# Altium PCB LeBot.PcbDoc
Units mm, origin at the board's own origin, x right, y up, seen from the top; angles counter-clockwise.
Board outline 152.4 x 101.6 mm, 4 copper layers (Top Layer, Ground/Power, Power/Ground, Bottom Layer), stack 0.778 mm thick; 99 components, 76 nets, 338 pads, 96 vias.
Unrouted connection lines stored in the file: 163.
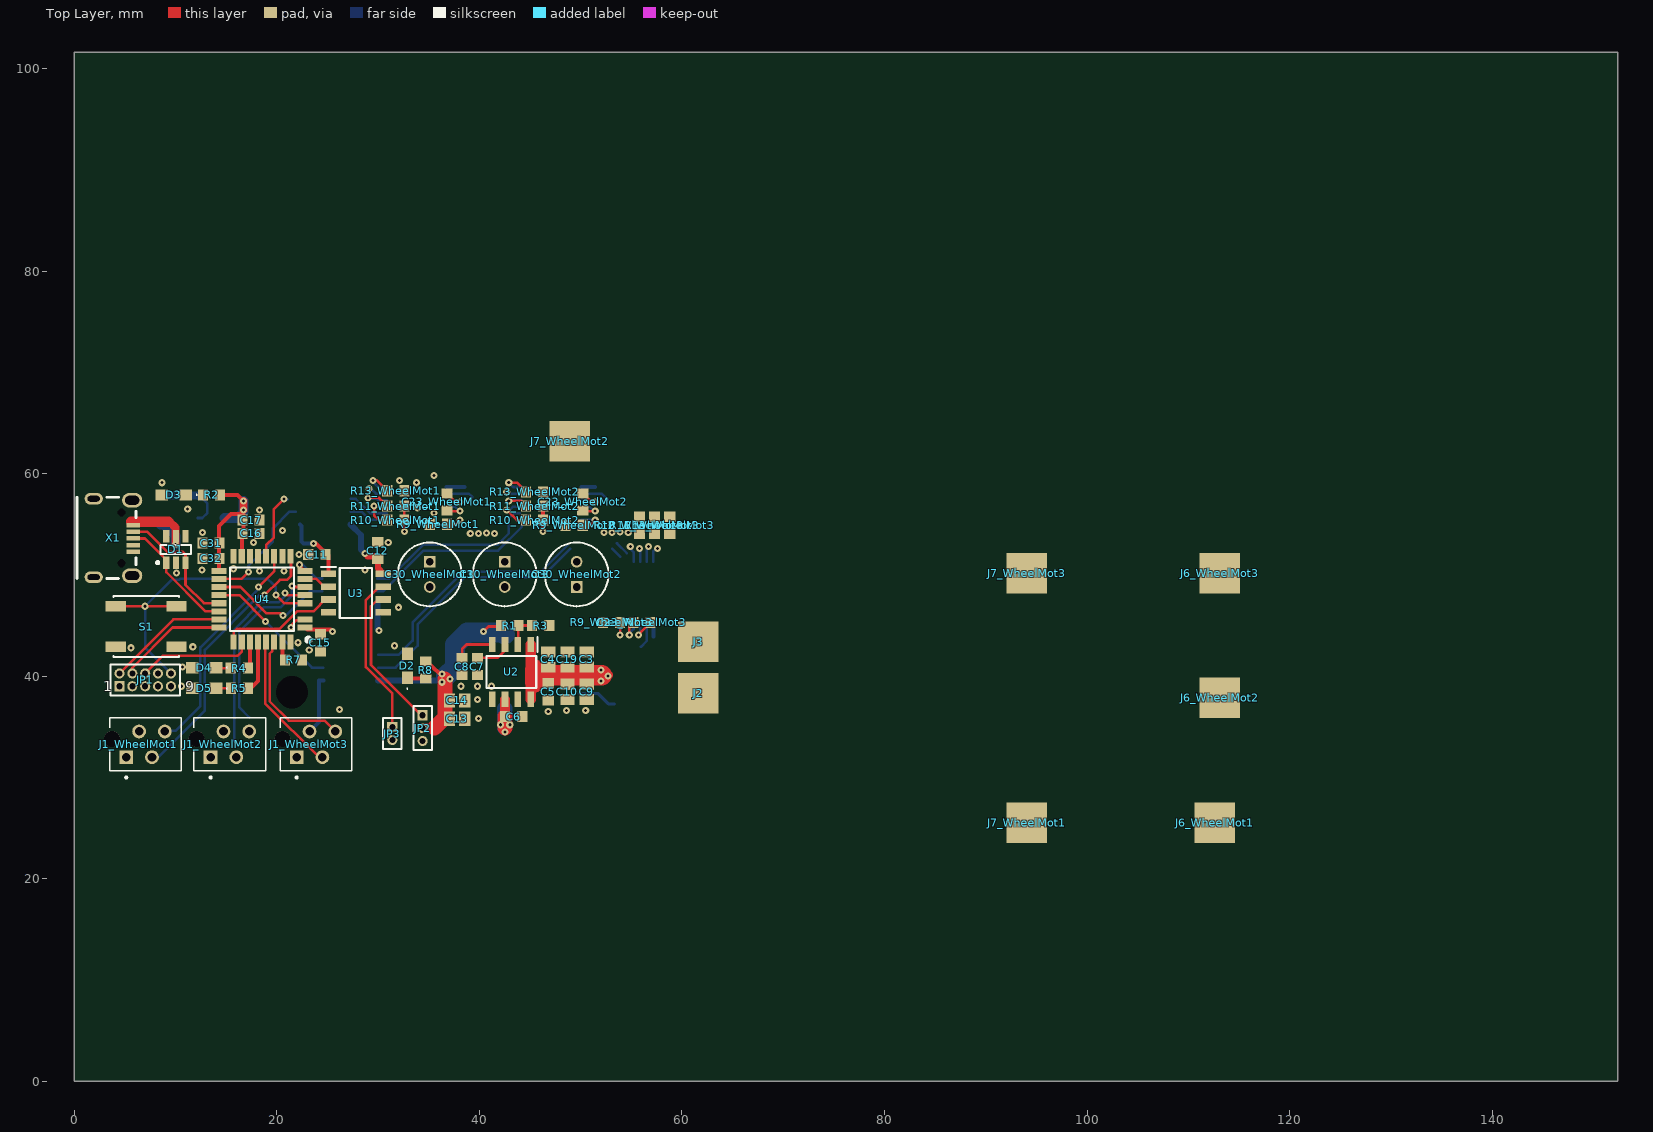
[diagram p0: Top Layer view]
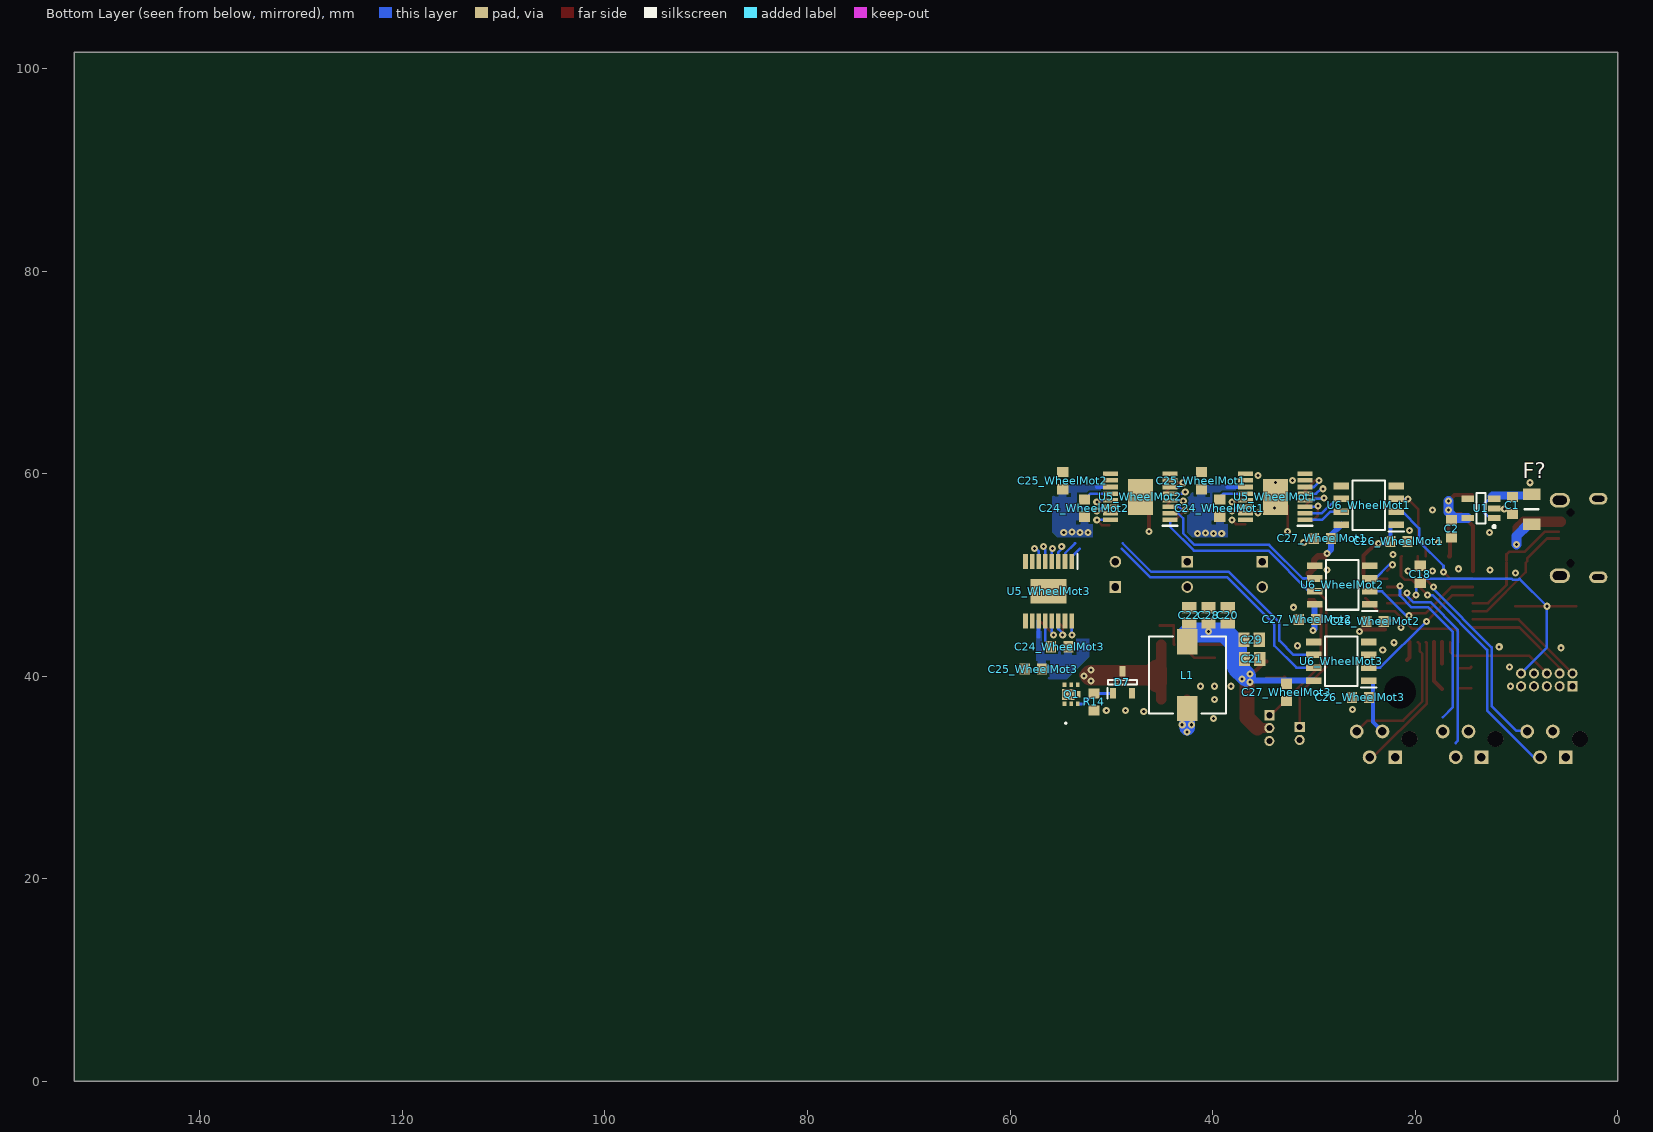
[diagram p1: Bottom Layer view, seen from below]
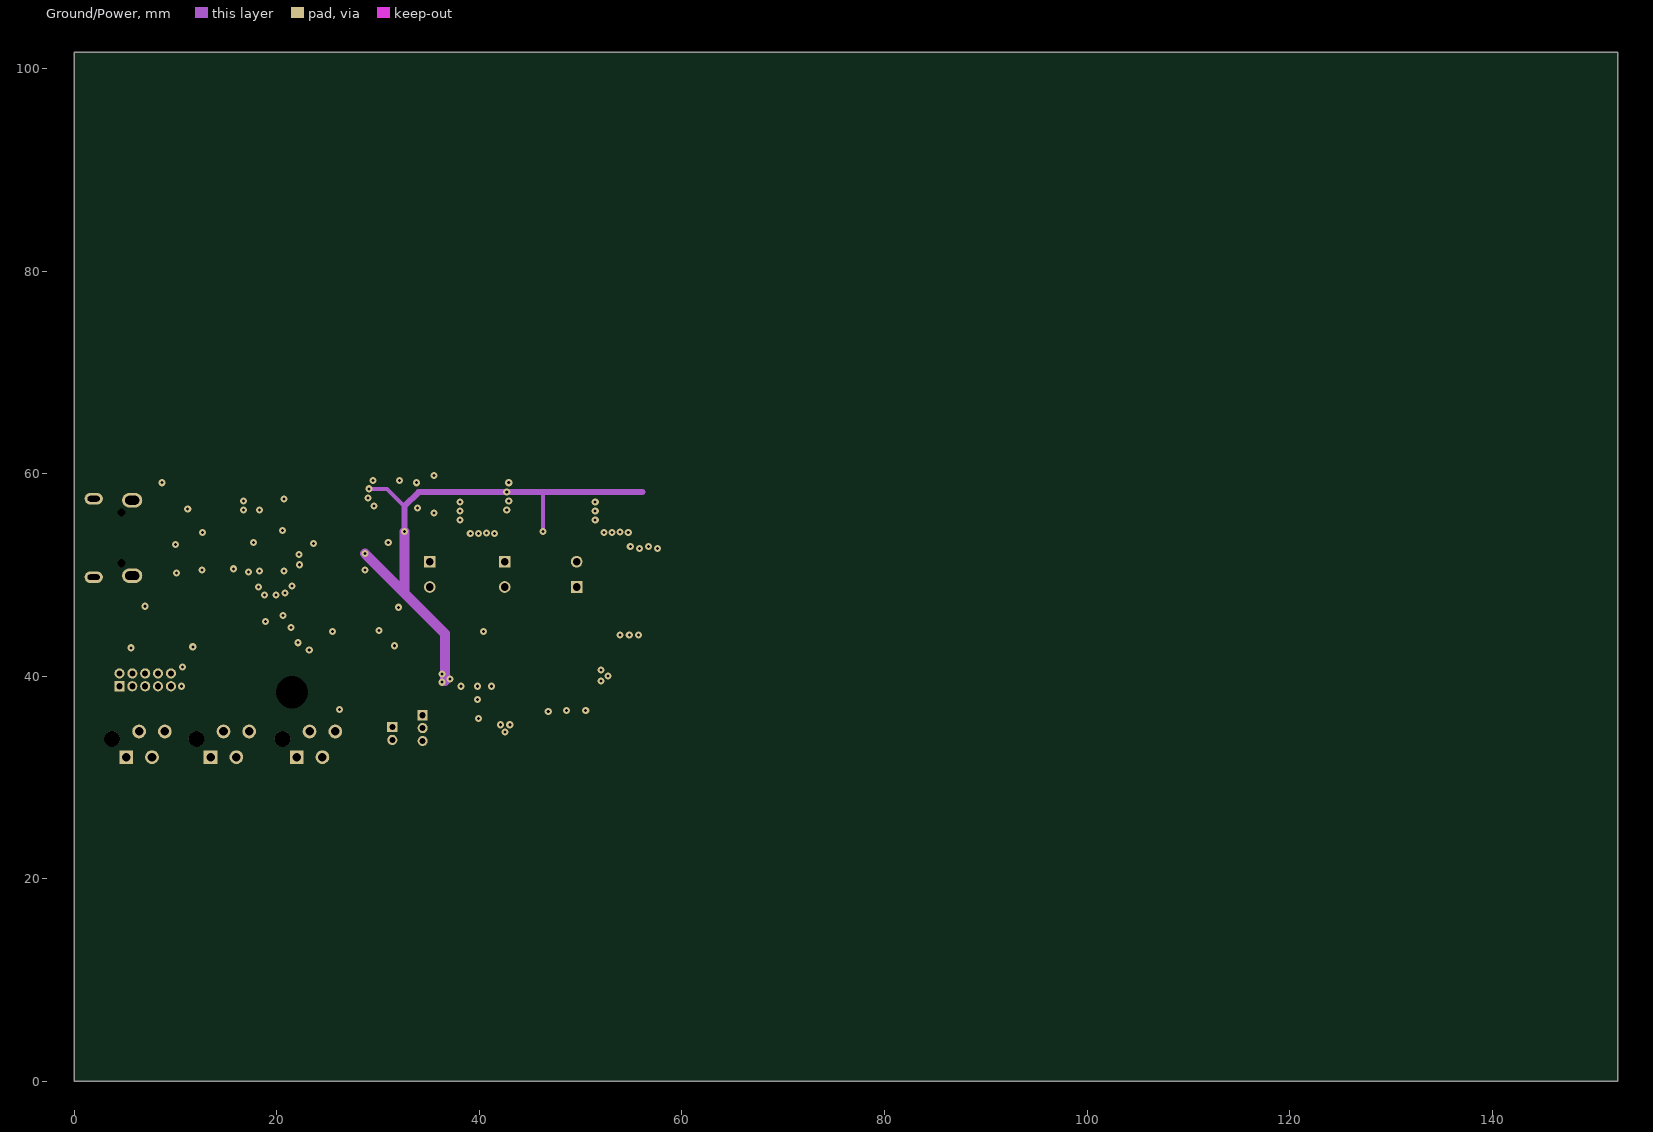
[diagram p2: Ground/Power]
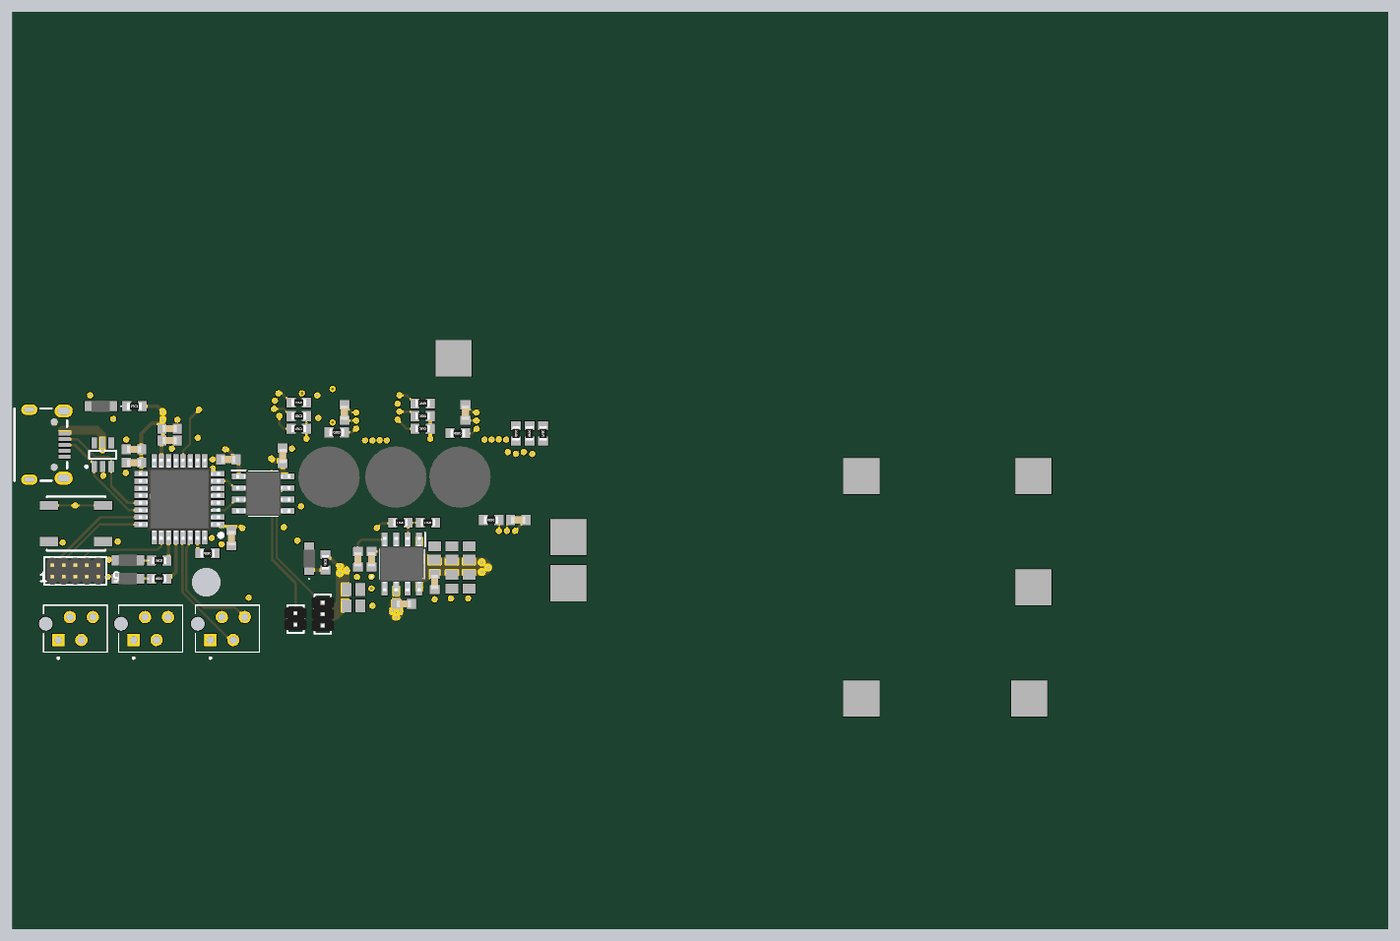
[diagram p3: 3D render of the assembled board from above, using the file's embedded part models]
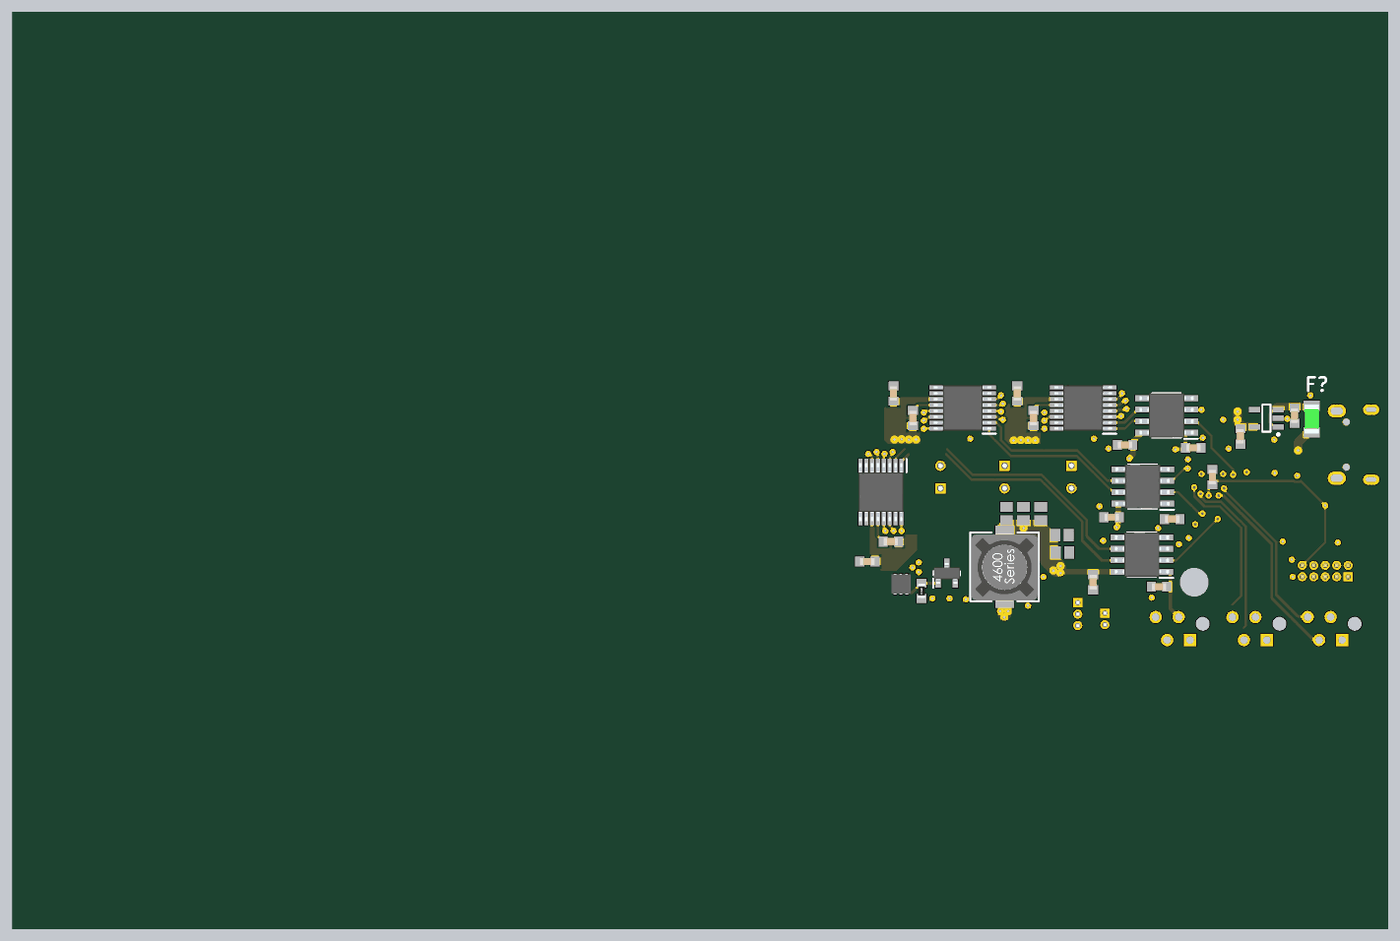
[diagram p4: 3D render of the assembled board from below, using the file's embedded part models]

## Layer stack, top to bottom
Top Solder: solder mask 0.0102, Solder Resist, Dk 3.5
Top Layer: signal copper 0.0356
Dielectric 1: core 0.254, FR-4, Dk 4.2
Ground/Power: signal copper 0.036
Dielectric 3: prepreg 0.127, Dk 4.2
Power/Ground: signal copper 0.036
Dielectric 2: core 0.254, Dk 4.2
Bottom Layer: signal copper 0.0356
Bottom Solder: solder mask 0.0102, Solder Resist, Dk 3.5

## Board outline
0,0 152.4,0 152.4,101.6 0,101.6

## Design rules (kind name [scope] priority, off if disabled: settings)
Clearance [All] p1: gap=0.2 ignorepadtopadclearanceinfootprint=TRUE except(0: Arc-Hole Track-Hole SMDPad-Hole THPad-Hole Via-Hole Fill-Hole Poly-Hole Region-Hole Text-Hole; 0.4: Fill-Fill Fill-Poly Fill-Region Poly-Poly Poly-Region Region-Region)
HoleSize [All] p1: absolutevalues=TRUE maxlimit=3 minlimit=0.2 maxpercent=80.000 minpercent=20.000
HoleToHoleClearance [All] p1: gap=0.15 allowstackedmicrovias=TRUE
MinimumAnnularRing [All] p1: minimumring=0.2
PlaneClearance [All] p1: clearance=0.5
PlaneConnect [All] p1: planeconnectstyle=Relief reliefexpansion=0.3 reliefentries=4 reliefconductorwidth=0.4 reliefairgap=0.2
PolygonConnect PolygonConnect_VIA [IsVia vs InNet('3V3')OR InNet('GND')OR InNet('BAT') OR InNet('5V') OR InNet('GND_B')] p1: connectstyle=Direct reliefconductorwidth=0.254 reliefentries=4 polygonreliefangle="90 Angle" airgapwidth=0.254
PolygonConnect PolygonConnect_BAT [InNet('BAT')] p2: thpad.connectstyle=Relief thpad.reliefconductorwidth=0.8 thpad.reliefentries=4 thpad.polygonreliefangle="90 Angle" thpad.airgapwidth=0.254 smdpad.connectstyle=Relief smdpad.reliefconductorwidth=0.8 smdpad.reliefentries=4 smdpad.polygonreliefangle="90 Angle" smdpad.airgapwidth=0.254 via.connectstyle=Direct via.reliefconductorwidth=0.254 via.reliefentries=4 via.polygonreliefangle="90 Angle" via.airgapwidth=0.254
PolygonConnect PolygonConnect_MotPow [InNet('MOT_POW_1_WheelMot1') OR InNet('MOT_POW_2_WheelMot1') OR InNet('MOT_POW_1_WheelMot2') OR InNet('MOT_POW_2_WheelMot2') OR InNet('MOT_POW_1_WheelMot3') OR InNet('MOT_POW_2_WheelMot3')] p3: thpad.connectstyle=Relief thpad.reliefconductorwidth=0.254 thpad.reliefentries=4 thpad.polygonreliefangle="90 Angle" thpad.airgapwidth=0.254 smdpad.connectstyle=Direct smdpad.reliefconductorwidth=0 smdpad.reliefentries=4 smdpad.polygonreliefangle="90 Angle" smdpad.airgapwidth=0.254 via.connectstyle=Direct via.reliefconductorwidth=0.254 via.reliefentries=4 via.polygonreliefangle="90 Angle" via.airgapwidth=0.254
PolygonConnect [All] p4: connectstyle=Relief reliefconductorwidth=0.3 reliefentries=4 polygonreliefangle="90 Angle" airgapwidth=0.2
RoomDefinition LeBot [InComponentClass('LeBot')] p1 off: confinementstyle=ConfineIn formatcopy=TRUE lockcomponents=FALSE outline 93.575,116.35 144.375,116.35 144.375,141.75 93.575,141.75
RoomDefinition WheelMot3 [InComponentClass('WheelMot3')] p2 off: confinementstyle=ConfineIn formatcopy=TRUE lockcomponents=FALSE outline 149,117.825 199.8,117.825 199.8,143.225 149,143.225
RoomDefinition WheelMot2 [InComponentClass('WheelMot2')] p3 off: confinementstyle=ConfineIn formatcopy=TRUE lockcomponents=FALSE outline 34.798,117.151 85.598,117.151 85.598,142.551 34.798,142.551
RoomDefinition WheelMot1 [InComponentClass('WheelMot1')] p4 off: confinementstyle=ConfineIn formatcopy=TRUE lockcomponents=FALSE outline 91.016,80.775 141.816,80.775 141.816,106.175 91.016,106.175
RoutingCorners [All] p1: cornerstyle=45-Degree minsetback=0.2 maxsetback=2.5
RoutingVias [All] p1: holewidth=0.3 width=0.7 viastyle="Through Hole" minholewidth=0.2 minwidth=0.6 maxholewidth=3 maxwidth=4
SilkToSilkClearance [All] p1: silktosilkclearance=0.2
SilkToSolderMaskClearance [IsPad] p1: minsilkscreentomaskgap=0.2 clearancetoexposedcopper=TRUE
SolderMaskExpansion SolderMaskExpansion_VIA [IsVia] p1: expansion=-1
SolderMaskExpansion [All] p2: expansion=0.1
Width [All] p1: maxlimit=5 minlimit=0.2 preferedwidth=0.3
23 further rules are at their usual default settings.

## Classes and differential pairs
channel class WheelMotor: WheelMot1 WheelMot2 WheelMot3
component class WheelMot3: C23_WheelMot3 C24_WheelMot3 C25_WheelMot3 C26_WheelMot3 C27_WheelMot3 C30_WheelMot3 J1_WheelMot3 J6_WheelMot3 J7_WheelMot3 R9_WheelMot3 R10_WheelMot3 R11_WheelMot3 R13_WheelMot3 U5_WheelMot3 U6_WheelMot3
component class WheelMot2: C23_WheelMot2 C24_WheelMot2 C25_WheelMot2 C26_WheelMot2 C27_WheelMot2 C30_WheelMot2 J1_WheelMot2 J6_WheelMot2 J7_WheelMot2 R9_WheelMot2 R10_WheelMot2 R11_WheelMot2 R13_WheelMot2 U5_WheelMot2 U6_WheelMot2
component class WheelMot1: C23_WheelMot1 C24_WheelMot1 C25_WheelMot1 C26_WheelMot1 C27_WheelMot1 C30_WheelMot1 J1_WheelMot1 J6_WheelMot1 J7_WheelMot1 R9_WheelMot1 R10_WheelMot1 R11_WheelMot1 R13_WheelMot1 U5_WheelMot1 U6_WheelMot1
component class LeBot: C1 C2 C3 C4 C5 C6 C7 C8 C9 C10 C11 C12 C13 C14 C15 C16 C17 C18 C19 C20 C21 C22 C28 C29 C31 C32 D1 D2 D3 D4 D5 D7 F? J2 J3 JP1 JP2 JP3 L1 Q1 R1 R2 R3 R4 R5 R7 R8 R14 S1 U1 U2 U3 U4 X1

## Components (designator, comment, footprint, x,y, rotation, side; value= is the part's Value field where it differs from the comment)
C1 "1uF*V" C0603 10.4,56.85 r90 bottom
C2 "1uF*V" C0603 16.4,54.55 r90 bottom
C3 "10uF*V" C0805 50.6,41.65 r270 top
C4 "10uF*V" C0805 46.8,41.65 r270 top
C5 "100nF*V" C0603 46.8,38.45 r90 top
C6 "100nF*V" C0603 43.38,36 r0 top
C7 "1uF*V" C0603 39.8,40.95 r90 top
C8 "10nF*V" C0603 38.3,40.95 r90 top
C9 "10uF*V" C0805 50.6,38.45 r90 top
C10 "10uF*V" C0805 48.7,38.45 r90 top
C11 "100nF*V" C0603 23.95,52 r0 top
C12 "100nF*V" C0603 29.97,52.4 r270 top
C13 "10uF*V" C0805 37.8,35.8 r180 top
C14 "10uF*V" C0805 37.8,37.6 r180 top
C15 "100nF*V" C0603 24.3,43.288 r90 top
C16 "100nF*V" C0603 17.45,54.1 r180 top
C17 "4.7uF*V" C0603 17.45,55.4 r180 top
C18 "100nF*V" C0603 19.5,50.05 r270 bottom
C19 "10uF*V" C0805 48.7,41.65 r270 top
C20 "10uF*V" C0805 38.5,46 r270 bottom
C21 "10uF*V" C0805 36.1,41.7 r0 bottom
C22 "10uF*V" C0805 42.3,46 r270 bottom
C23_WheelMot1 "22nF *V" C0603 36.8,57.2 r270 top (schematic designator C23)
C23_WheelMot2 "22nF *V" C0603 50.2,57.2 r270 top (schematic designator C23)
C23_WheelMot3 "22nF *V" C0603 56.05,45.3 r180 top (schematic designator C23)
C24_WheelMot1 "100nF *V" C0603 39.3,56.59 r270 bottom (schematic designator C24)
C24_WheelMot2 "100nF *V" C0603 52.659,56.59 r270 bottom (schematic designator C24)
C24_WheelMot3 "100nF *V" C0603 55.09,42.9 r180 bottom (schematic designator C24)
C25_WheelMot1 "100nF *V" C0603 41.1,59.3 r270 bottom (schematic designator C25)
C25_WheelMot2 "100nF *V" C0603 54.8,59.3 r270 bottom (schematic designator C25)
C25_WheelMot3 "100nF *V" C0603 57.7,40.7 r180 bottom (schematic designator C25)
C26_WheelMot1 "100nF *V" C0603 21.6,53.3 r0 bottom (schematic designator C26)
C26_WheelMot2 "100nF *V" C0603 23.95,45.4 r0 bottom (schematic designator C26)
C26_WheelMot3 "100nF *V" C0603 25.4,37.9 r180 bottom (schematic designator C26)
C27_WheelMot1 "100nF *V" C0603 29.162,53.6 r180 bottom (schematic designator C27)
C27_WheelMot2 "100nF *V" C0603 30.65,45.6 r180 bottom (schematic designator C27)
C27_WheelMot3 "100nF *V" C0603 32.7,38.4 r90 bottom (schematic designator C27)
C28 "10uF*V" C0805 40.4,46 r270 bottom
C29 "10uF*V" C0805 36.15,43.6 r0 bottom
C30_WheelMot1 "100uF" CAPPRD250W55D630H1220 35.1,51.3 r270 top (schematic designator C30)
C30_WheelMot2 "100uF" CAPPRD250W55D630H1220 49.6,48.8 r90 top (schematic designator C30)
C30_WheelMot3 "100uF" CAPPRD250W55D630H1220 42.5,51.3 r270 top (schematic designator C30)
C31 "100nF*V" C0603 13.5,53.132 r0 top
C32 "1uF*V" C0603 13.5,51.632 r0 top
D1 "USBLC6-4" SOT-236 10.033,52.514 r90 top
D2 "=\"PartNumber\"" LED_0805 32.9,41.025 r90 top
D3 "=\"PartNumber\"" LED_0805 9.825,57.9 r180 top
D4 "=\"PartNumber\"" LED_0805 12.825,40.83 r180 top
D5 "=\"PartNumber\"" LED_0805 12.825,38.8 r180 top
D7 "*" SOT23-Zener 48.9,39.4 r90 bottom
F? "0437.375WR" FUSC3216X86N 8.5,56.48 r90 bottom
J1_WheelMot1 "215079-4" TE_215079-4 5.13,32 r180 top (schematic designator J1)
J1_WheelMot2 "215079-4" TE_215079-4 13.46,32 r180 top (schematic designator J1)
J1_WheelMot3 "215079-4" TE_215079-4 21.96,32 r180 top (schematic designator J1)
J2 "Connection_pad" Wire_Pad 61.6,38.206 r0 top
J3 "Connection_pad" Wire_Pad 61.6,43.306 r0 top
J6_WheelMot1 "Connection_pad" Wire_Pad 112.698,25.525 r90 top (schematic designator J6)
J6_WheelMot2 "Connection_pad" Wire_Pad 113.206,37.844 r90 top (schematic designator J6)
J6_WheelMot3 "Connection_pad" Wire_Pad 113.206,50.163 r90 top (schematic designator J6)
J7_WheelMot1 "Connection_pad" Wire_Pad 94.156,25.525 r90 top (schematic designator J7)
J7_WheelMot2 "Connection_pad" Wire_Pad 49,63.2 r90 top (schematic designator J7)
J7_WheelMot3 "Connection_pad" Wire_Pad 94.156,50.163 r90 top (schematic designator J7)
JP1 "PIN_2x5" 1.27_2X5H 4.46,39 r0 top
JP2 "PIN_1x3" 1.27_1X3H 34.4,36.14 r270 top
JP3 "PIN_1x2" 1.27_1X2H 31.4,34.97 r270 top
L1 "Inductor" L73 42.5,40.1 r90 bottom
Q1 "BUK4D38-20P" PMPB12EPX 53.2,38.2 r90 bottom
R1 "124k" R0603 43,45 r180 top
R2 "280R" R0603 13.55,57.9 r0 top
R3 "22k1" R0603 46.05,45 r180 top
R4 "700R" R0603 16.3,40.8 r0 top
R5 "700R" R0603 16.306,38.8 r0 top
R7 "10k" R0603 21.65,41.6 r180 top
R8 "620R" R0603 34.7,40.6 r90 top
R9_WheelMot1 "10k" R0603 35.95,55 r0 top (schematic designator R9)
R9_WheelMot2 "10k" R0603 49.35,54.9 r0 top (schematic designator R9)
R9_WheelMot3 "10k" R0603 53.05,45.3 r0 top (schematic designator R9)
R10_WheelMot1 "10k" R0603 31.75,55.4 r0 top (schematic designator R10)
R10_WheelMot2 "10k" R0603 45.45,55.4 r0 top (schematic designator R10)
R10_WheelMot3 "10k" R0603 55.8,54.894 r90 top (schematic designator R10)
R11_WheelMot1 "10k" R0603 31.75,56.8 r0 top (schematic designator R11)
R11_WheelMot2 "10k" R0603 45.45,56.8 r0 top (schematic designator R11)
R11_WheelMot3 "10k" R0603 57.3,54.894 r90 top (schematic designator R11)
R13_WheelMot1 "3k2" R0603 31.75,58.3 r180 top (schematic designator R13)
R13_WheelMot2 "3k2" R0603 45.45,58.2 r180 top (schematic designator R13)
R13_WheelMot3 "3k2" R0603 58.8,54.894 r270 top (schematic designator R13)
R14 "100k" R0603 51.7,37.45 r270 bottom
S1 "EVQQ" EVQQ 7.1,44.9 r0 top
U1 "MIC5504*" SOT-235 13.51,56.564 r0 bottom
U2 "TPS54227DDAR" SOIC127P600X175-8N 43.165,40.412 r270 top
U3 "SI8620NB" SOIC127P600X175-8N 27.812,48.205 r0 top
U4 "STM32G431KB" QFP80P900X900X160-32N 18.538,47.6 r180 top locked
U5_WheelMot1 "DRV8874PWPR" SOP65P640X120-17N 33.8,57.7 r0 bottom (schematic designator U5)
U5_WheelMot2 "DRV8874PWPR" SOP65P640X120-17N 47.138,57.7 r0 bottom (schematic designator U5)
U5_WheelMot3 "DRV8874PWPR" SOP65P640X120-17N 56.2,48.382 r270 bottom (schematic designator U5)
U6_WheelMot1 "SI8620NB" SOIC127P600X175-8N 24.565,56.874 r0 bottom (schematic designator U6)
U6_WheelMot2 "SI8620NB" SOIC127P600X175-8N 27.212,49.005 r0 bottom (schematic designator U6)
U6_WheelMot3 "SI8620NB" SOIC127P600X175-8N 27.3,41.47 r0 bottom (schematic designator U6)
X1 "USB" "USB MicroB Type 2.0" 3.175,53.594 r270 top

## Footprints (in the part's own frame and the unit in brackets; to place one, negate y for a bottom-side part, rotate by r counter-clockwise, add the part's x,y. Pads: shape width x height; smd on the part's side, far side on the other; paste and mask are expansions set on the pad)
1.27_1X2H [mm] "1.27mm header, 1x2 pins"
  rect 1x1 hole 0.6: 1(0,0)
  round 1 hole 0.6: 2(1.27,0)
  silkscreen extent -0.9,-0.9 2.17,0.9, body extent -0.64,-1.27 1.9,1.23, height 5.34
1.27_1X3H [mm] "1.27mm header, 1x3 pins"
  rect 1x1 hole 0.6: 1(0,0)
  round 1 hole 0.6: 2(1.27,0) 3(2.54,0)
  silkscreen extent -0.9,-0.9 3.44,0.9, body extent -0.63,-1.25 3.18,1.25, height 5.34
1.27_2X5H [mm] "1.27mm header, 2x5 pins"
  rect 1x1 hole 0.6: 1(0,0)
  round 1 hole 0.6: 2(0,1.27) 3(1.27,0) 4(1.27,1.27) 5(2.54,0) 6(2.54,1.27) 7(3.81,0) 8(3.81,1.27) 9(5.08,0) 10(5.08,1.27)
  silkscreen extent -0.9,-0.9 5.98,2.17, body extent -0.63,-0.85 5.72,2.15, height 4.7
C0603 [mm] "0603 ceramic capacitor"
  rect 1x1.1 smd: 1(-0.85,0) 2(0.85,0)
  body extent -0.8,-0.4 0.8,0.4, height 0.8
C0805 [mm] "Chip Capacitor, Body 2.0x1.3mm, IPC High Density"
  rect 1.1x1.4 smd: 1(-0.75,0) 2(0.75,0)
  body extent -1.1,-0.72 1.1,0.72, height 1.4
CAPPRD250W55D630H1220 [mm]
  rect 1.15x1.15 hole 0.75: 1(0,0)
  round 1.15 hole 0.75: 2(2.5,0)
  silkscreen extent -1.9,-3.15 4.4,3.15, body extent -2.15,-3.4 4.65,3.4, height 12.2
EVQQ [mm] "Switch, 2-Leads, Body 6,50x6,00mm, Panasonic EVQQ/EVQP"
  rect 2x1 smd: 1(-3,2) 1(3,2) 2(-3,-2) 2(3,-2)
  silkscreen extent -3.25,-3 3.25,3, body extent -3.25,-3 3.25,3, height 3
FUSC3216X86N [mm]
  rect 1.14x1.75 smd: 1(-1.48,0) 2(1.48,0)
  silkscreen extent 0,-0.69 0,0.69, body extent -1.6,-0.79 1.6,0.79, height 0.86
L73 [mm] "Shielded Inductor, 2-Leads, Body 7,30x7,30mm"
  rect 2.5x2.05 smd: 1(-3.3,0) 2(3.3,0)
  silkscreen extent -3.8,-3.8 3.8,3.8, body extent -3.76,-3.65 3.66,3.65, height 4.55
LED_0805 [mm]
  rect 1.25x1.1 smd: 1(-1.175,0) 2(1.175,0)
  silkscreen extent -2.3,-0.05 -2.2,0.05, body extent -1,-0.62 1,0.63, height 0.95
PMPB12EPX [mm]
  rect 0.66x0.35 smd: 1(0,0)
  rect 0.43x0.35 smd: 1(0.935,0.125) 2(-0.935,0.125) 3(-0.935,0.775) 3(-0.935,1.425) 3(0.935,0.775) 3(0.935,1.425)
  rect 1.1x1.25 smd: 3(0,1.06)
  silkscreen extent -2.9,1.25 -2.8,1.35, body extent -1.11,-0.28 1.12,1.83, height 0.75
QFP80P900X900X160-32N [mm]
  rect 1.475x0.6 smd: 1(-4.238,2.8) 2(-4.238,2) 4(-4.238,0.4) 5(-4.238,-0.4) 6(-4.238,-1.2) 7(-4.238,-2) 8(-4.238,-2.8) 17(4.238,-2.8) 18(4.238,-2) 19(4.238,-1.2) 20(4.238,-0.4) 21(4.238,0.4) 22(4.238,1.2) 23(4.238,2) 24(4.238,2.8)
  rect 0.6x1.475 smd: 9(-2.8,-4.238) 10(-2,-4.238) 11(-1.2,-4.238) 12(-0.4,-4.238) 13(0.4,-4.238) 14(1.2,-4.238) 15(2,-4.238) 16(2.8,-4.238) 25(2.8,4.238) 26(2,4.238) 27(1.2,4.238) 28(0.4,4.238) 29(-0.4,4.238) 30(-1.2,4.238) 31(-2,4.238) 32(-2.8,4.238)
  silkscreen extent -4.77,-3.15 3.15,4.2, body extent -4.5,-4.5 4.5,4.5, height 1.6
R0603 [mm] "0603 resistor"
  rect 1x1.1 smd: 1(-0.85,0) 2(0.85,0)
  body extent -0.8,-0.4 0.8,0.4, height 0.45
SOIC127P600X175-8N [mm]
  rect 1.525x0.65 smd: 1(-2.712,1.905) 2(-2.712,0.635) 3(-2.712,-0.635) 4(-2.712,-1.905) 5(2.712,-1.905) 6(2.712,-0.635) 7(2.712,0.635) 8(2.712,1.905)
  silkscreen extent -3.47,-2.45 1.6,2.58, body extent -3,-2.45 3,2.45, height 1.75
SOP65P640X120-17N [mm]
  rect 1.475x0.45 smd: 1(-2.938,2.275) 2(-2.938,1.625) 3(-2.938,0.975) 4(-2.938,0.325) 5(-2.938,-0.325) 6(-2.938,-0.975) 7(-2.938,-1.625) 8(-2.938,-2.275) 9(2.938,-2.275) 10(2.938,-1.625) 11(2.938,-0.975) 12(2.938,-0.325) 13(2.938,0.325) 14(2.938,0.975) 15(2.938,1.625) 16(2.938,2.275)
  rect 2.46x3.55 smd: 17(0,0)
  silkscreen extent -3.67,2.85 -2.2,2.85, body extent -3.2,-2.5 3.2,2.5, height 1.2
SOT23-Zener [mm] "SOT95P230X110-3N"
  rect 1.05x0.6 smd: 1(-1.1,0.95) 2(1.1,0) 3(-1.1,-0.95)
  silkscreen extent -1.63,-1.45 0.23,1.5, body extent -1.15,-1.45 1.15,1.45, height 1.1
SOT-235 [mm] "SOT23, 5-Leads, Body 2,90x2,75mm, Pitch 0,95mm"
  rect 1.22x0.6 smd: 1(-1.31,0.95) 2(-1.31,0) 3(-1.31,-0.95) 4(1.31,-0.95) 5(1.31,0.95)
  silkscreen extent -1.43,-1.5 0.45,1.92, body extent -0.85,-1.5 0.85,1.5, height 1.1
SOT-236 [mm] "SOT23, 6-Leads, Body 2,90x2,75mm, Pitch 0,95mm"
  rect 1.22x0.6 smd: 1(-1.31,0.95) 2(-1.31,0) 3(-1.31,-0.95) 4(1.31,-0.95) 5(1.31,0) 6(1.31,0.95)
  silkscreen extent -1.43,-1.5 0.45,1.92, body extent -0.85,-1.5 0.85,1.5, height 1.1
TE_215079-4 [mm]
  rect 1.358x1.358 hole 0.85: 1(0,0)
  round 1.358 hole 0.85: 2(-1.27,-2.54) 3(-2.54,0) 4(-3.81,-2.54)
  round 1.55 hole 1.55 unplated: ""(1.4,-1.8)
  silkscreen extent -5.43,-3.87 1.65,2.11
"USB MicroB Type 2.0" [mm] "629105150521, Wurth Elektronik, Micro 2.0 Type B, 5 pins"
  round 0 hole 0.8: 7(-2.55,1.49) 7(2.45,1.49)
  rect 0.45x1.3 smd: D+(0,2.64) D-(-0.65,2.64) GND(1.3,2.64) ID(0.65,2.64) VCC(-1.3,2.64)
  oval 1.15x1.8 hole 0.55 slot 1.2 at 90 deg: ""(-3.925,-1.26) ""(3.825,-1.26)
  oval 1.45x2 hole 0.85 slot 1.4 at 90 deg: ""(-3.775,2.54) ""(3.675,2.54)
  silkscreen extent -4.05,-2.91 3.95,2.92, body extent 3.96,-3.85 4.76,-2.65, height 0.25
Wire_Pad [mm] "Pad for soldering wires"
  rect 4x4 smd: 1(0,0.094)

## Part data
C1 C2 C7 C32: library part Capacitor, "Ceramic capacitor", Capacitance=1uF, Voltage rating=*V, ComponentLinknDescription=Datasheet, Note=C0603, Type=MLCC
C3 C4 C9 C10 C13 C14 C19 C20 C21 C22 C28 C29: library part Capacitor, "Ceramic capacitor", Capacitance=10uF, Voltage rating=*V, ComponentLinknDescription=Datasheet, Note=C0805, Type=MLCC
C5 C6 C11 C12 C15 C16 C18 C24_WheelMot1 C24_WheelMot2 C24_WheelMot3 C25_WheelMot1 C25_WheelMot2 C25_WheelMot3 C26_WheelMot1 C26_WheelMot2 C26_WheelMot3 C27_WheelMot1 C27_WheelMot2 C27_WheelMot3 C31: library part Capacitor, "Ceramic capacitor", Capacitance=100nF, Voltage rating=*V, ComponentLinknDescription=Datasheet, Type=MLCC
  C5 C6 C11 C12 C15 C16 C18 C31: Note=C0603
  C24_WheelMot1 C24_WheelMot2 C24_WheelMot3 C25_WheelMot1 C25_WheelMot2 C25_WheelMot3 C26_WheelMot1 C26_WheelMot2 C26_WheelMot3 C27_WheelMot1 C27_WheelMot2 C27_WheelMot3: Note=CurrentFootprint
C8: library part Capacitor, "Ceramic capacitor", Capacitance=10nF, Voltage rating=*V, ComponentLinknDescription=Datasheet, Note=C0603, Type=MLCC
C17: library part Capacitor, "Ceramic capacitor", Capacitance=4.7uF, Voltage rating=*V, ComponentLinknDescription=Datasheet, Note=C0603, Type=MLCC
C23_WheelMot1 C23_WheelMot2 C23_WheelMot3: library part Capacitor, "Ceramic capacitor", Capacitance=22nF, Voltage rating=*V, ComponentLinknDescription=Datasheet, Note=CurrentFootprint, Type=MLCC
C30_WheelMot1 C30_WheelMot2 C30_WheelMot3: library part EEUFC1E101S, "Capacitor Polarised", Capacitance=100uF
D1: "USB ESD Protection", Manufacturer="ST Microelectronics", ComponentLinknDescription=Datasheet, Part number=USBLC6-4, Space heritage=false, Verified=false
D2 D3: library part LED, "Light Emitting Diode", Colour=Orange, Forward Current=20mA, Forward Voltage=2.1V, Part number=MC011368, Power dissipation=false, ComponentLinknDescription=Datasheet, Farnell Order Nr=3015159, Space heritage=false
D4 D5: library part LED, "Light Emitting Diode", Colour=Green, Forward Current=2mA, Forward Voltage=1.9V, Part number=KP-2012LSGC, Power dissipation=false, ComponentLinknDescription=Datasheet, Farnell Order Nr=2463991, Space heritage=false
D7: library part "Zener Diode"
F?: "Fuse", Manufacturer_Name=LITTELFUSE, Datasheet Link=https://ms.componentsearchengine.com/Datasheets/2/0437.375WR.pdf, Height=0.864mm, Manufacturer_Part_Number=0437.375WR
J1_WheelMot1 J1_WheelMot2 J1_WheelMot3: "4 Position Receptacle Connector Through Hole", Package="SMD-6 Omron Electronics", Availability=Unavailable, EU_RoHS_Compliance=Compliant, MF="TE Connectivity", MP=215079-4, Price=None, SnapEDA_Link=https://www.snapeda.com/parts/215079-4/TE%20Connectivity%20AMP%20Connectors/view-part/2366486/?ref=snap, TE_purchase_URL=https://www.te.com/usa-en/product-215079-4.html?te_bu=Cor&te_type=disp&te_campaign=seda_glo_cor-seda-global-disp-prtnr-fy19-seda-model-bom-cta_sma-317_1&elqCampaignId=32493
L1: DC resistance=*R, Inductance=4.7uH, RMS current=*A, Self resonant frequency=*Hz, ComponentLinknDescription=Datasheet, Note=4.7uHL73, Saturation current=*A
Q1: library part "P-Channel MOSFET", "P-Channel MOSFET", Drain Current=-18A, DS Breakdown Volt=-20V, GS breakdown Volt=12V/-12V, Datasheet=https://eu.mouser.com/datasheet/2/916/BUK4D38-20P-1880069.pdf, Farnell Order Nr=3526152, Mouser Order Nr=771-BUK4D38-20PX, PartNumber=BUK4D38-20P, rDSon=30mOhm
R1 R2 R3 R4 R5 R7 R8 R9_WheelMot1 R9_WheelMot2 R9_WheelMot3 R10_WheelMot1 R10_WheelMot2 R10_WheelMot3 R11_WheelMot1 R11_WheelMot2 R11_WheelMot3 R13_WheelMot1 R13_WheelMot2 R13_WheelMot3 R14: library part Resistor, "Resistor", Power rating=*mW, Temp coefficient=*ppm, Voltage rating=*V, ComponentLinknDescription=Datasheet, Precision=*%
  R1: Note=R0603, Resistance=124k
  R2: Note=R0603, Resistance=280R
  R3: Note=R0603, Resistance=22k1
  R4 R5: Note=R0603, Resistance=700R
  R7: Note=R0603, Resistance=10k
  R8: Note=R0603, Resistance=620R
  R9_WheelMot1 R9_WheelMot2 R9_WheelMot3 R10_WheelMot1 R10_WheelMot2 R10_WheelMot3 R11_WheelMot1 R11_WheelMot2 R11_WheelMot3: Note=CurrentFootprint, Resistance=10k
  R13_WheelMot1 R13_WheelMot2 R13_WheelMot3: Note=CurrentFootprint, Resistance=3k2
  R14: Note=R0603, Resistance=100k
S1: "Switch", Manufacturer=Panasonic, ComponentLinknDescription=Datasheet, Drawn by="Erik Ilbis", Part number=EVQQ, Space heritage=false, Verified=false
U1: library part MIC5504, "Low-dropout voltage regulator", Current rating="300 mA", Input Voltage="2V5 to 5V5", Manufacturer=Microchip/Micrel, Accuracy=2%, ComponentLink1Description=Datasheet, ComponentLink1URL=https://www.mouser.ee/datasheet/2/268/MIC550X-1082389.pdf, Drawn by="Roberts Oskars Komarovskis", Part number=MIC5504, Space heritage=false, Verified=false
U2: "4.5-V to 18-V Input, 2-A SynchronousStep-DownConverter", Manufacturer_Name="Texas Instruments", Datasheet Link=http://www.ti.com/lit/gpn/tps54227, Farnell Order Nr=3007320, Height=1.7mm, Manufacturer_Part_Number=TPS54227DDAR, PartNumber=TPS54227DDAR
U3 U6_WheelMot1 U6_WheelMot2 U6_WheelMot3: library part SI8620BB-B-IS, "Digital Isolator, 2 Channel, 8 ns, 2.5 V, 5.5 V, NSOIC, 8 Pins", Manufacturer="Silicon Labs", PackageType=20, PartNumber=SI86, ComponentLink1Description=Datasheet, ComponentLink1URL=http://www.farnell.com/datasheets/2244974.pdf?_ga=2.133957773.2069242502.1604233078-1290644116.1596735146&_gac=1.216125090.1601500870.EAIaIQobChMI2YybtueR7AIVis_tCh0ENQp0EAAYASAAEgKKifD_BwE, Datasheet=http://www.farnell.com/datasheets/2244974.pdf?_ga=2.133957773.2069242502.1604233078-1290644116.1596735146&_gac=1.216125090.1601500870.EAIaIQobChMI2YybtueR7AIVis_tCh0ENQp0EAAYASAAEgKKifD_BwE, Drawn by="Roberts Oskars Komarovskis", Str1=NB
U4: "ARM MCU, STM32 Family STM32G4 Series Microcontrollers, ARM Cortex-M4F, 32bit, 170 MHz, 64 KB, 32 KB", Manufacturer=STMicroelectronics, ComponentLink1Description=Datasheet, ComponentLink1URL=3515807, Datasheet=https://eu.mouser.com/datasheet/2/389/stm32g431c6-1600866.pdf, Drawn by="Roberts Oskars Komarovskis", Farnell Order Nr=3515807
U5_WheelMot1 U5_WheelMot2 U5_WheelMot3: "DRV8874H-BridgeMotorDriverWith IntegratedCurrentSenseand Regulation", Manufacturer_Name="Texas Instruments", ComponentLink1Description=Datasheet, ComponentLink1URL=https://www.ti.com/lit/gpn/DRV8874, Datasheet Link=https://www.ti.com/lit/gpn/DRV8874, Height=1.2mm, Manufacturer_Part_Number=DRV8874PWPR
JP1 JP2 JP3: Drawn by="Erik Ilbis"

## Free pads (board coordinates)
  round 0 hole 3.2 unplated: 6(21.5,38.4)

## Via types
v1: diameter 0.7, hole 0.3, Top Layer to Bottom Layer, 96 vias

## Nets (pads, with @x,y where several pads share a name; then routed paths per layer and width w, separated by ;. In a path a pad name is that pad's centre, name@x,y a point inside that pad or via, vN(x,y) a via of type N, cw(c..) or ccw(c..) an arc to the next point about the centre after c; other vN are vias at no path point)
3V3: C2.2 C11.2 C15.2 C16.2 C17.2 C26_WheelMot1.2 C26_WheelMot2.2 C26_WheelMot3.2 C31.2 C32.2 J1_WheelMot1.2 J1_WheelMot2.2 J1_WheelMot3.2 JP1.1 R2.2 U1.5 U3.1 U4.1 U4.15 U4.17 U6_WheelMot1.1 U6_WheelMot2.1 U6_WheelMot3.1 | length 33.9
  Top Layer w0.4: U4.17 14.3,54.844 15.456,56 16.7,56 ; R2.2 16.1,57.9 v1(16.7,57.3) ; U4.15@16.638,51.838 U4.15 16.538,54.038 C16.2 16.7,54.2 16.7,56 ; v1(16.7,56.4) 16.7,56 ; U4.1@23,44.6 25.3,44.6 v1(25.5,44.4) ; v1(23.6,53.114) 23.886,53.114 25.1,51.9 U3.1
  Top Layer w0.8: v1(16.7,56.4) v1(16.7,57.3)
  Bottom Layer w0.4: U6_WheelMot1.1@22.3,54.969 22.45,54.819 C26_WheelMot1.2 22.636,53.114 v1(23.6,53.114) ; J1_WheelMot3.2 24.15,35.46 24.15,39.565 U6_WheelMot3.1
  Bottom Layer w1: U1.5 16.114,55.614 16.7,56.2 v1(16.7,56.4) v1(16.7,57.3)
5V: C1.2 F?.2 U1.1 U1.3 | length 7.1
  Bottom Layer w0.254: U1.1 12.634,55.614 13.137,56.117 13.137,57.063 12.686,57.514 U1.3
  Bottom Layer w0.8: F?.2@8.637,57.844 12.356,57.844 U1.3@12.443,57.757
5V_B: C12.2 C13.2 C14.2 C20.2 C21.2 C22.2 C27_WheelMot1.2 C27_WheelMot2.2 C27_WheelMot3.2 C28.2 C29.2 JP2.2 L1.2 R1.2 R8.2 R10_WheelMot1.2 R10_WheelMot2.2 R10_WheelMot3.2 R11_WheelMot1.2 R11_WheelMot2.2 R11_WheelMot3.2 U3.8 U5_WheelMot1.5 U5_WheelMot2.5 U5_WheelMot3.5 U6_WheelMot1.8 U6_WheelMot2.8 U6_WheelMot3.8 | length 102.7
  Top Layer w0.254: v1(32.6,54.3) R10_WheelMot1.2 R11_WheelMot1.2 ; v1(40.4,44.4) 40.9,44.9 42.05,44.9 R1.2
  Top Layer w0.4: R8.2 34.85,41.45 36.6,39.7 ; v1(46.3,54.3) R11_WheelMot2.2
  Top Layer w0.6: v1(28.7,52.1) 28.962,51.838 29.597,51.838 30,51.435 30,50.634 U3.8
  Top Layer w1: JP2.2 35.57,34.87
  Top Layer w1.5: 35.57,34.87 36.6,35.9 36.6,39.7
  Ground/Power w0.4: v1(29.1,58.5) 30.869,58.5 32.6,56.769 ; 46.2,58.179 46.3,58.079 v1(46.3,54.3)
  Ground/Power w0.6: v1(32.6,54.3) 32.6,56.769 34.01,58.179 v1(42.7,58.179) 46.2,58.179 56.08,58.179
  Ground/Power w1: v1(28.7,52.1) 32.6,48.2 ; v1(32.6,54.3) 32.6,48.2 ; v1@36.6,39.531 36.6,44.2 32.6,48.2
  Bottom Layer w0.254: v1(29.1,58.5) 29.3,58.5 29.775,58.025 U5_WheelMot1.5 ; v1(42.7,58.179) 42.854,58.025 U5_WheelMot2.5 ; U5_WheelMot3.5 56.525,52.464 v1@56.761,52.7
  Bottom Layer w0.6: U6_WheelMot1.8 28.312,53.934 C27_WheelMot1.2 28.312,52.488 v1(28.7,52.1) ; U6_WheelMot2.8 29.924,44.676 v1(30.1,44.5) ; U6_WheelMot3.8 36.265,39.565 36.7,40
  Bottom Layer w2: 36.7,40 37.6,40.9 37.6,43.1 38.8,44.3 42.3,44.3 L1.2@42.5,44.1
  other v1: 36.3,39.4 37.1,39.7 36.3,40.2 56.679,52.82
5V_PRE: D1.5 F?.1 X1.VCC | length 9
  Top Layer w0.8: 9.301,55.245 9.421,55.245 10,54.666 v1@10,53.1
  Top Layer w1: 5.588,55.245 9.301,55.245
  Bottom Layer w1: F?.1 8.84,55 10,53.84 v1(10,53)
BAT: C3.2 C4.2 C5.2 C9.2 C10.2 C19.2 C24_WheelMot1.2 C24_WheelMot2.2 C24_WheelMot3.2 C25_WheelMot1.2 C25_WheelMot2.2 C25_WheelMot3.2 C30_WheelMot1.1 C30_WheelMot2.1 C30_WheelMot3.1 D7.2 Q1.1 U2.1 U2.8 U5_WheelMot1.11 U5_WheelMot2.11 U5_WheelMot3.11 | length 18.8
  Top Layer w1: U2.8 U2.1 ; 52.1,40.1 v1@52.7,40.1
  Top Layer w2: 45.5,39.4 45.5,40.661 46.061,40.1 46.8,40.1 52,40.1 52.1,40.1
  Bottom Layer w0.4: U5_WheelMot1.11 38.525,58.675 ; U5_WheelMot2.11 51.425,58.675 ; 57.175,43.925 U5_WheelMot3.11
  other v1: 52,39.531 52.7,40.031 52,40.6 39.1,54.1 39.9,54.1 41.5,54.1 40.7,54.134 52.3,54.2 53.1,54.2 54.7,54.2 53.9,54.234
BAT_PRE: J2.1 Q1.3
DBG_1: R4.2 U4.27 | length 2.1
  Top Layer w0.4: R4.2@17.338,41.262 U4.27
DBG_2: R5.2 U4.28 | length 4.9
  Top Layer w0.4: R5.2@17.35,38.75 18.138,39.538 U4.28
DIR_B_WheelMot1: U5_WheelMot1.2 U6_WheelMot1.6 | length 4.2
  Bottom Layer w0.254: U6_WheelMot1.6 27.791,57.509 29.225,56.075 U5_WheelMot1.2
DIR_B_WheelMot2: U5_WheelMot2.2 U6_WheelMot2.6 | length 17.6
  Bottom Layer w0.254: U6_WheelMot2.6 31.098,49.64 34.424,52.966 41.766,52.966 42.9,54.1 42.9,55.579 43.404,56.083 U5_WheelMot2.2@44,56.083
DIR_B_WheelMot3: U5_WheelMot3.2 U6_WheelMot3.6 | length 25.8
  Bottom Layer w0.254: U6_WheelMot3.6 32.005,42.105 33.4,43.5 33.4,45.3 38.4,50.3 46.058,50.3 48.872,53.114 ; 53.586,53.114 54.55,52.15
GND: C1.1 C2.1 C11.1 C15.1 C16.1 C17.1 C18.1 C26_WheelMot1.1 C26_WheelMot2.1 C26_WheelMot3.1 C31.1 C32.1 D1.2 D3.2 D4.2 D5.2 J1_WheelMot1.1 J1_WheelMot2.1 J1_WheelMot3.1 JP1.3 JP1.5 JP1.9 pad.6 R7.1 S1.2 U1.2 U3.4 U4.14 U4.16 U4.32 U6_WheelMot1.4 U6_WheelMot2.4 U6_WheelMot3.4 X1.GND
  other v1: 26.2,36.7 10.6,39 10.7,40.9 23.2,42.6 5.6,42.8 11.7,42.9 22.1,43.3 10.1,50.2 18.3,50.4 20.7,50.4 12.6,50.5 15.7,50.6 22.2,52 17.7,53.2 12.64,54.2 20.56,54.4 18.3,56.4 11.2,56.5 8.65,59.1
GND_B: C3.1 C4.1 C5.1 C7.1 C8.1 C9.1 C10.1 C12.1 C13.1 C14.1 C19.1 C20.1 C21.1 C22.1 C25_WheelMot1.1 C25_WheelMot2.1 C25_WheelMot3.1 C27_WheelMot1.1 C27_WheelMot2.1 C27_WheelMot3.1 C28.1 C29.1 C30_WheelMot1.2 C30_WheelMot2.2 C30_WheelMot3.2 D2.2 J3.1 JP2.3 JP3.2 R3.1 R9_WheelMot1.1 R9_WheelMot2.1 R9_WheelMot3.1 R13_WheelMot1.1 R13_WheelMot2.1 R13_WheelMot3.1 R14.2 U2.5 U3.5 U5_WheelMot1.7 U5_WheelMot1.9 U5_WheelMot1.15 U5_WheelMot1.17 U5_WheelMot2.7 U5_WheelMot2.9 U5_WheelMot2.15 U5_WheelMot2.17 U5_WheelMot3.7 U5_WheelMot3.9 U5_WheelMot3.15 U5_WheelMot3.17 U6_WheelMot1.5 U6_WheelMot2.5 U6_WheelMot3.5
  other v1: 39.9,35.8 46.8,36.5 48.6,36.6 50.5,36.6 39.8,37.7 38.2,39 39.8,39 41.2,39 31.6,43 32,46.8 28.7,50.5 31,53.2 35.5,56.1 33.9,56.6 33.8,59.1 32.1,59.325 35.5,59.8
M1_DIR: U4.12 U6_WheelMot1.3 | length 6.8
  Top Layer w0.254: U4.12 18.938,52.938 19.7,53.7 19.7,56.5 v1(20.7,57.5)
  Bottom Layer w0.254: v1(20.7,57.5) 20.993,57.5 21.053,57.44
M1_ENC_A: J1_WheelMot1.3 U4.9 | length 26.6
  Top Layer w0.254: v1(18.8,48) 20.3,49.5 21,49.5 21.4,49.9 21.4,51.776 U4.9
  Bottom Layer w0.254: J1_WheelMot1.3 8.3,32 12.9,36.6 12.9,42.6 18.3,48 v1(18.8,48)
M1_ENC_B: J1_WheelMot1.4 U4.11 | length 22.6
  Top Layer w0.254: v1(18.2,48.8) 19.738,50.338 U4.11
  Bottom Layer w0.254: J1_WheelMot1.4@8.7,34.6 10,34.6 12.443,37.043 12.443,42.843 18.2,48.6 v1(18.2,48.8)
M1_PWM: U4.18 U6_WheelMot1.2 | length 11.4
  Top Layer w0.254: U4.18 16.5,49.6 v1(17.2,50.3)
  Bottom Layer w0.254: v1(17.2,50.3) 17.2,50.9 19.6,53.3 19.6,54.6 21.239,56.239 U6_WheelMot1.2
M2_DIR: U4.8 U6_WheelMot2.3 | length 3.7
  Top Layer w0.254: v1(22.224,51) 22.2,50.976 U4.8
  Bottom Layer w0.254: v1(22.224,51) 22.57,51 23.93,49.64 U6_WheelMot2.3
M2_ENC_A: J1_WheelMot2.3 U4.5 | length 20
  Top Layer w0.254: v1(20.8,48.2) 21,48 U4.5
  Bottom Layer w0.254: 16,33.4 15.8,33.6 15.8,44.6 18.5,47.3 20.2,47.3 20.8,47.9 v1(20.8,48.2)
M2_ENC_B: J1_WheelMot2.4 U4.6 | length 17.8
  Top Layer w0.254: v1(21.5,48.9) 21.6,48.8 U4.6
  Bottom Layer w0.254: 17.27,35.94 16.3,36.91 16.3,44.4 18.7,46.8 20.36,46.8 21.5,47.94 v1(21.5,48.9)
M2_PWM: U4.19 U6_WheelMot2.2 | length 12.3
  Top Layer w0.254: U4.19 16.4,48.8 19,46.2 20.4,46.2 v1(20.6,46)
  Bottom Layer w0.254: v1(20.6,46) 20.9,46 23.27,48.37 U6_WheelMot2.2
M3_DIR: U4.2 U6_WheelMot3.3 | length 1.7
  Top Layer w0.254: v1(21.4,44.8) 21.4,45 21.9,45.5 U4.2@22.7,45.5
M3_ENC_A: J1_WheelMot3.3 U4.29 | length 14
  Top Layer w0.254: U4.29 18.846,43.27 18.846,37.312 24.258,31.9 J1_WheelMot3.3@24.4,31.9 ; J1_WheelMot3.3@24.058,32 J1_WheelMot3.3@24.098,32.127
M3_ENC_B: J1_WheelMot3.4 U4.30 | length 13.7
  Top Layer w0.254: U4.30 19.565,43.189 19.565,42.489 19.3,42.224 19.3,37.5 21.2,35.6 24.71,35.6 J1_WheelMot3.4
M3_PWM: U4.20 U6_WheelMot3.2 | length 13.3
  Top Layer w0.254: U4.20 16.3,48 v1(18.9,45.4)
  Bottom Layer w0.254: v1(18.9,45.4) 23.465,40.835 U6_WheelMot3.2
MOT_POW_1_WheelMot1: J6_WheelMot1.1 U5_WheelMot1.8
MOT_POW_1_WheelMot2: J6_WheelMot2.1 U5_WheelMot2.8
MOT_POW_1_WheelMot3: J6_WheelMot3.1 U5_WheelMot3.8
MOT_POW_2_WheelMot1: J7_WheelMot1.1 U5_WheelMot1.10
MOT_POW_2_WheelMot2: J7_WheelMot2.1 U5_WheelMot2.10
MOT_POW_2_WheelMot3: J7_WheelMot3.1 U5_WheelMot3.10
NetC6_1: C6.1 L1.1 U2.6 | length 4.7
  Top Layer w1: C6.1 U2.6
  Top Layer w1.5: 42.53,34.9 C6.1
  Bottom Layer w1.5: 42.5,34.9 L1.1
  other v1: 42.53,34.5 42.1,35.2 43,35.2
NetC6_2: C6.2 U2.7
NetC7_2: C7.2 U2.3 | length 3.6
  Top Layer w0.254: C7.2 41.8,41.8 42.53,42.53 U2.3
NetC8_2: C8.2 U2.4 | length 4
  Top Layer w0.254: C8.2 38.3,42.7 38.724,43.124 U2.4
NetC23_WheelMot1_1: C23_WheelMot1.1 U5_WheelMot1.13 | length 1.7
  Top Layer w0.254: C23_WheelMot1.1 37.65,57.2 v1(38.1,57.2)
NetC23_WheelMot1_2: C23_WheelMot1.2 U5_WheelMot1.14 | length 3
  Top Layer w0.254: C23_WheelMot1.2 36.85,56.3 v1(38.1,56.3)
  Bottom Layer w0.254: U5_WheelMot1.14 37.575,56.725 38.1,56.2 v1(38.1,56.3)
NetC23_WheelMot2_1: C23_WheelMot2.1 U5_WheelMot2.13 | length 2.8
  Top Layer w0.254: C23_WheelMot2.1 51.05,57.2 v1(51.438,57.2)
  Bottom Layer w0.254: U5_WheelMot2.13 v1@51.325,57.375
NetC23_WheelMot2_2: C23_WheelMot2.2 U5_WheelMot2.14 | length 2.8
  Top Layer w0.254: C23_WheelMot2.2 50.25,56.3 v1(51.438,56.3)
  Bottom Layer w0.254: U5_WheelMot2.14 50.886,56.725 v1@51.375,56.237
NetC23_WheelMot3_1: C23_WheelMot3.1 U5_WheelMot3.13 | length 3
  Top Layer w0.254: v1(55.7,44.082) 55.7,44.1 C23_WheelMot3.1
  Bottom Layer w0.254: v1@55.875,44.195 U5_WheelMot3.13
NetC23_WheelMot3_2: C23_WheelMot3.2 U5_WheelMot3.14 | length 2.9
  Top Layer w0.254: v1(54.8,44.082) 54.8,44.9 C23_WheelMot3.2
  Bottom Layer w0.254: v1@54.737,44.145 55.225,44.634 U5_WheelMot3.14
NetC24_WheelMot1_1: C24_WheelMot1.1 U5_WheelMot1.12 | length 2.7
  Bottom Layer w0.254: U5_WheelMot1.12 38.95,58.025 C24_WheelMot1.1@39.3,57.675
NetC24_WheelMot2_1: C24_WheelMot2.1 U5_WheelMot2.12 | length 2.8
  Bottom Layer w0.254: U5_WheelMot2.12 52.074,58.025 C24_WheelMot2.1
NetC24_WheelMot3_1: C24_WheelMot3.1 U5_WheelMot3.12 | length 2.8
  Bottom Layer w0.254: C24_WheelMot3.1 56.525,43.485 U5_WheelMot3.12
NetD2_1: D2.1 R8.1 | length 1.8
  Top Layer w0.4: D2.1 33,39.75 R8.1
NetD3_1: D3.1 R2.1
NetD4_1: D4.1 R4.1 | length 1.2
  Top Layer w0.254: D4.1@14.475,40.9 14.575,40.8 R4.1@15.6,40.8
NetD5_1: D5.1 R5.1 | length 1.1
  Top Layer w0.254: D5.1@14.475,38.8 R5.1@15.6,38.8
NetD7_1: D7.1 Q1.2 R14.1 | length 3.9
  Bottom Layer w0.3: D7.1 R14.1 52.735,37.265 Q1.2
NetR1_1: R1.1 R3.2 U2.2 | length 3.2
  Top Layer w0.254: U2.2 43.85,43.174 R1.1 R3.2
NetR7_2: R7.2 U4.31 | length 1.9
  Top Layer w0.4: U4.31 20.538,41.862 R7.2
NetR9_WheelMot1_2: R9_WheelMot1.2 U5_WheelMot1.16 | length 1.5
  Top Layer w0.254: R9_WheelMot1.2 37.7,55 v1(38.1,55.4)
NetR9_WheelMot2_2: R9_WheelMot2.2 U5_WheelMot2.16 | length 2.7
  Top Layer w0.254: R9_WheelMot2.2 50.938,54.9 v1(51.438,55.4)
  Bottom Layer w0.254: U5_WheelMot2.16 v1@51.3,55.425
NetR9_WheelMot3_2: R9_WheelMot3.2 U5_WheelMot3.16 | length 2.4
  Top Layer w0.254: v1(53.9,44.082) R9_WheelMot3.2
  Bottom Layer w0.254: v1@53.925,44.22 U5_WheelMot3.16
NetR10_WheelMot1_1: R10_WheelMot1.1 U5_WheelMot1.3 | length 3.7
  Top Layer w0.254: v1(29.6,56.8) 29.6,55.87 30.07,55.4 R10_WheelMot1.1
  Bottom Layer w0.254: v1(29.6,56.8) 29.675,56.725 U5_WheelMot1.3
NetR10_WheelMot2_1: R10_WheelMot2.1 U5_WheelMot2.3 | length 3.9
  Top Layer w0.254: v1(42.7,56.4) 43.7,55.4 R10_WheelMot2.1
  Bottom Layer w0.254: v1(42.7,56.4) 42.975,56.4 43.3,56.725 U5_WheelMot2.3
NetR10_WheelMot3_1: R10_WheelMot3.1 U5_WheelMot3.3 | length 1.5
  Bottom Layer w0.254: v1@54.9,52.7 54.9,52.561 55.225,52.236 U5_WheelMot3.3
  other v1: 54.9,52.82
NetR11_WheelMot1_1: R11_WheelMot1.1 U5_WheelMot1.4 | length 3.9
  Top Layer w0.254: v1(29,57.6) 30.088,57.6 R11_WheelMot1.1@30.694,56.994
  Bottom Layer w0.254: v1(29,57.6) 29.081,57.519 29.845,57.519 29.989,57.375 U5_WheelMot1.4
NetR11_WheelMot2_1: R11_WheelMot2.1 U5_WheelMot2.4 | length 3.2
  Top Layer w0.254: v1(42.9,57.3) 44.1,57.3 R11_WheelMot2.1
  Bottom Layer w0.254: v1(42.9,57.3) 42.975,57.375 U5_WheelMot2.4
NetR11_WheelMot3_1: R11_WheelMot3.1 U5_WheelMot3.4 | length 1.3
  Bottom Layer w0.254: U5_WheelMot3.4 v1@55.875,52.575
  other v1: 55.8,52.62
NetR13_WheelMot1_2: R13_WheelMot1.2 U5_WheelMot1.6 | length 3.5
  Top Layer w0.254: v1(29.5,59.325) 29.875,59.325 R13_WheelMot1.2
  Bottom Layer w0.254: v1(29.5,59.325) 29.5,59.175 30,58.675 U5_WheelMot1.6
NetR13_WheelMot2_2: R13_WheelMot2.2 U5_WheelMot2.6 | length 3.5
  Top Layer w0.254: v1(42.9,59.1) 43.7,59.1 R13_WheelMot2.2
  Bottom Layer w0.254: v1(42.9,59.1) 43.325,58.675 U5_WheelMot2.6
NetR13_WheelMot3_2: R13_WheelMot3.2 U5_WheelMot3.6 | length 1.3
  Bottom Layer w0.254: U5_WheelMot3.6 57.175,52.35 v1@57.4,52.575
  other v1: 57.6,52.62
PWM_B_WheelMot1: U5_WheelMot1.1 U6_WheelMot1.7 | length 3.9
  Bottom Layer w0.254: U6_WheelMot1.7 28.375,56.239 29.189,55.425 U5_WheelMot1.1
PWM_B_WheelMot2: U5_WheelMot2.1 U6_WheelMot2.7 | length 17.6
  Bottom Layer w0.254: U6_WheelMot2.7 30.47,48.37 34.5,52.4 41.85,52.4 44.2,54.75 U5_WheelMot2.1
PWM_B_WheelMot3: U5_WheelMot3.1 U6_WheelMot3.7 | length 26.2
  Bottom Layer w0.254: U6_WheelMot3.7 31.735,40.835 33.9,43 33.9,45.1 38.569,49.769 46.169,49.769 48.983,52.583 ; 53.117,52.583 U5_WheelMot3.1@53.9,51.8
RESET: C18.2 JP1.10 S1.1 U4.4 | length 32.1
  Top Layer w0.254: S1.1@4.1,46.9 v1(7,46.9) S1.1@10.1,46.9 ; v1(19.9,48) 20.7,47.2 U4.4
  Bottom Layer w0.254: JP1.10 7,42.81 v1(7,46.9) 9.7,49.6 9.743,49.6 9.82,49.523 10.38,49.523 10.457,49.6 19.1,49.6 C18.2 19.9,48.8 v1(19.9,48)
SERV_PWM: U3.3 U4.25 | length 11.5
  Top Layer w0.254: U4.25 15.738,44.338 16.1,44.7 20.3,44.7 22,46.4 23.6,46.4 U3.3@24.904,47.704
SERV_PWM_B: JP2.1 U3.6 | length 14.2
  Top Layer w0.254: U3.6 29.97,47.57 29.3,46.9 29.3,41.1 JP2.1@34.2,36.2
SWCLK: JP1.4 U4.24 | length 10.8
  Top Layer w0.254: JP1.4 5.73,40.83 9.7,44.8 U4.24
SWDIO: JP1.2 U4.23 | length 12
  Top Layer w0.254: JP1.2 9.79,45.6 U4.23
SWO: JP1.6 U4.26 | length 11.4
  Top Layer w0.254: JP1.6 8.73,42 16.1,42 16.538,42.438 U4.26
THRW_PWM: U3.2 U4.7 | length 2.6
  Top Layer w0.254: U4.7 23.9,49.6 24.66,48.84 U3.2
THRW_PWM_B: JP3.1 U3.7 | length 15.9
  Top Layer w0.254: U3.7 30.14,48.84 28.8,47.5 28.8,40.9 31.4,38.3 JP3.1
USB_DM: D1.3 U4.21 X1.D- | length 12.9
  Top Layer w0.254: X1.D- 7.224,54.244 9.168,52.3 10.7,52.3 10.983,52.017 D1.3@10.983,51.435 ; D1.3 10.983,49.017 12.8,47.2 U4.21
USB_DP: D1.1 U4.22 X1.D+ | length 12
  Top Layer w0.254: X1.D+ 6.97,53.594 8.938,51.626 D1.1@8.938,51.356 ; D1.1 9.083,50.26 12.943,46.4 U4.22
pads on no net: D1.4 D1.6 D7.3 J1_WheelMot1. J1_WheelMot2. J1_WheelMot3. JP1.7 JP1.8 U1.4 U4.10 U4.13 X1. X1.7 X1.ID

## Polygon pours and split planes (outlines as drawn)
BAT on Bottom Layer "Bottom Layer-BAT" (solid, pour order 4): 55.338,53.7 55.838,54.2 55.838,57.7 54.638,58.9 50.038,58.9 50.038,58.1 52.938,58.1 52.938,57.1 51.838,56 51.838,53.7
BAT on Bottom Layer "Bottom Layer-BAT 1" (solid, pour order 6): 52.2,41.9 54.418,39.682 56.2,39.682 57.4,40.882 57.4,45.482 56.6,45.482 56.6,42.582 55.6,42.582 54.5,43.682 52.2,43.682
BAT on Bottom Layer "Bottom Layer-BAT 2" (solid, pour order 0): 42,53.7 42.5,54.2 42.5,57.7 41.3,58.9 36.7,58.9 36.7,58.1 39.6,58.1 39.6,57.1 38.5,56 38.5,53.7

## Silkscreen, mask and mechanical layers (free items; w line width, h text height)
Mechanical 1:
  lines w0.254: 0,2.667 0,0 5.715,0

## Text inside footprints (layer, text, board x,y; h text height)
JP1: Top Overlay "1" at 2.86,38.492 h1; Top Overlay "9" at 10.96,38.492 h1